# EAGLE board 3DO (EAGLE 9.6.2)
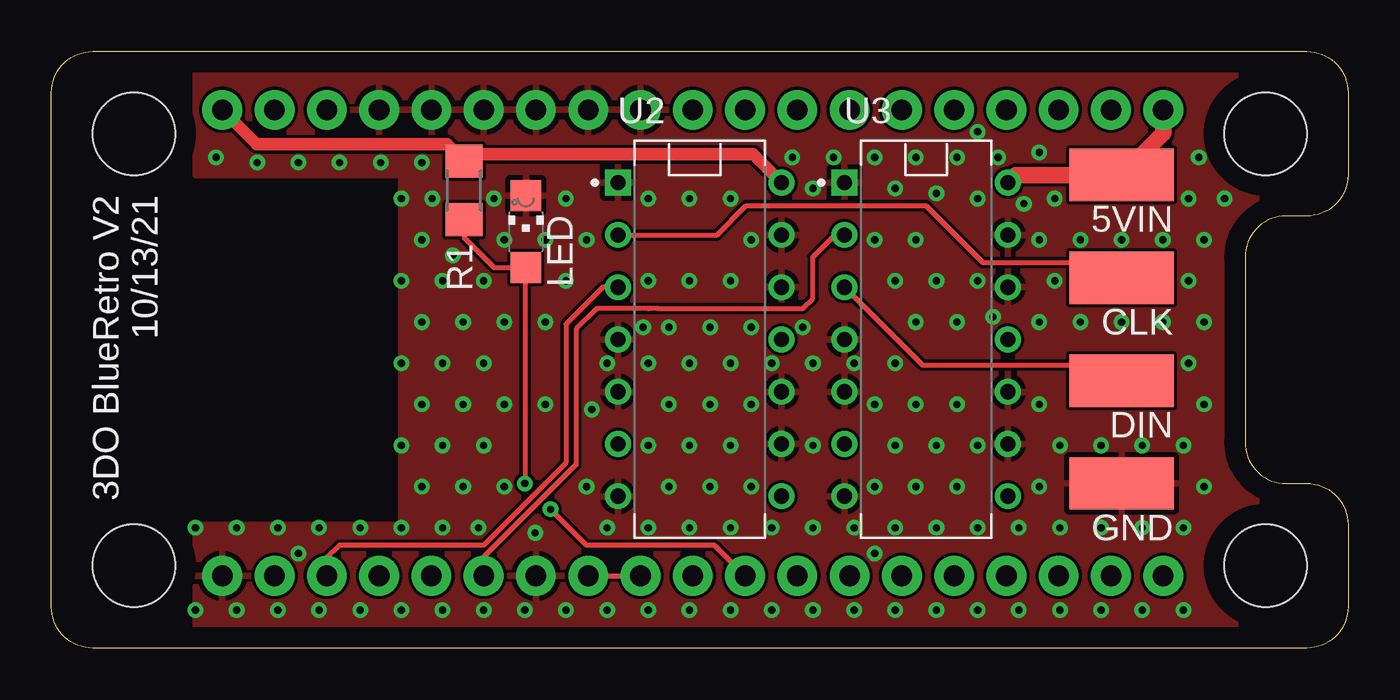
[diagram p0: board, top side]
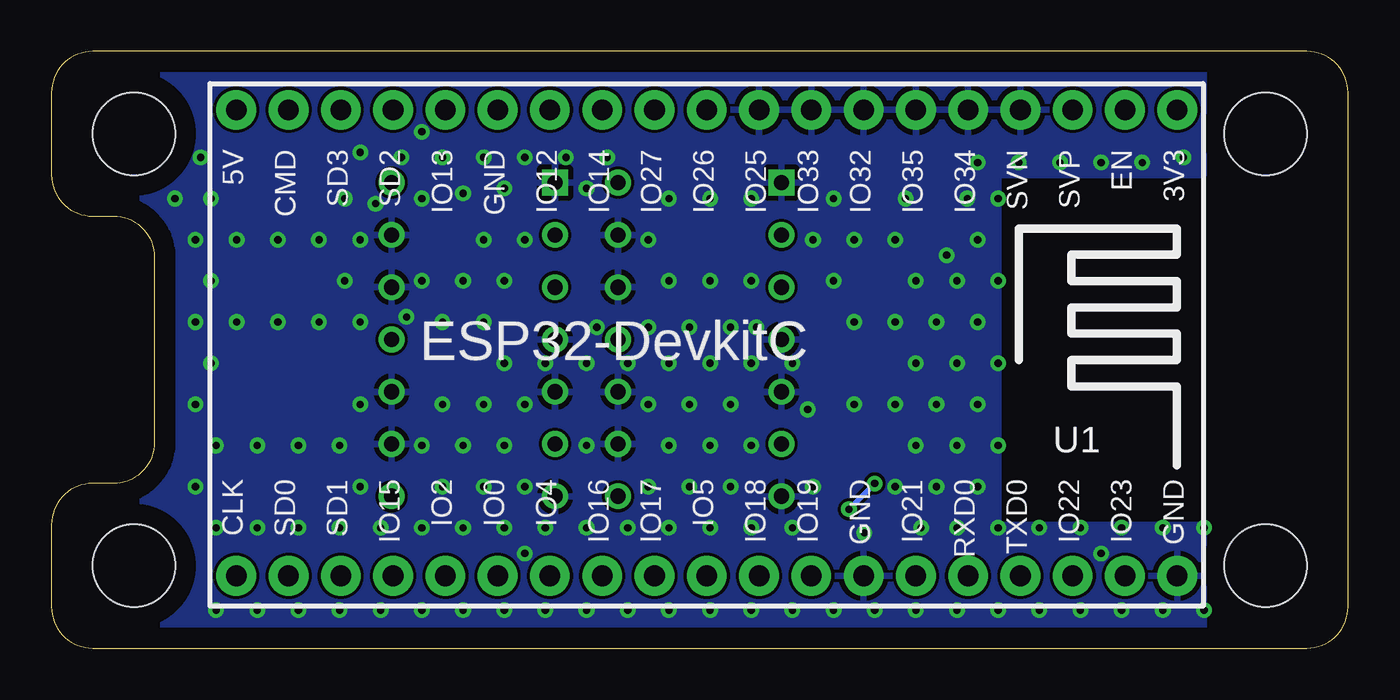
[diagram p1: board, bottom side, seen from below]

Size 63 x 29 mm. Coordinates in mm from the lower left corner, seen from the top.
Outline: 0,2 0,27 arc-90 2,29 61,29 arc-90 63,27 63,23 arc-90 61,21 60,21 arc90 58,19 58,10 arc90 60,8 61,8 arc-90 63,6 63,2 arc-90 61,0 2,0 arc-90 0,2
Copper layers (1*16): Top 0.035mm / dielectric 1.5mm / Bottom 0.035mm
Design rules "default": minimum track width 6mil, minimum drill 0.35mm, track to track 6mil, track to pad 6mil, pad to pad 6mil, via to via 6mil, smd to smd 6mil, copper to edge 40mil, drill to drill 6mil, minimum pad ring 10mil, minimum via ring 8mil, stop-mask expansion 4mil, vias tented up to drill 0.5mm, thermal gap 10mil
Holes 4 mm at 4,4 4,25 59,25 59,4

## Footprints (pad centres in the part's own frame; a part is rotated, then mirrored left to right if it is on the bottom)
SMD2,54-5,08 = smd 2.54 x 5.08: 1 0,0
CHIPLED_1206 = smd 1.5 x 1.5: A 0,-1.75; C 0,1.75
R1206 = smd 1.6 x 1.803: 1 -1.422,0; 2 1.422,0
ESP32-DEVKITC = drill 1 pad 1.93: 1 -22.87,-11.42; 2 -20.33,-11.42; 3 -17.79,-11.42; 4 -15.25,-11.42; 5 -12.71,-11.42; 6 -10.17,-11.42; 7 -7.63,-11.42; 8 -5.09,-11.42; 9 -2.55,-11.42; 10 -0.01,-11.42; 11 2.53,-11.42; 12 5.07,-11.42; 13 7.61,-11.42; 14 10.15,-11.42; 15 12.69,-11.42; 16 15.23,-11.42; 17 17.77,-11.42; 18 20.31,-11.42; 19 22.85,-11.42; 20 22.85,11.23; 21 20.31,11.23; 22 17.77,11.23; 23 15.23,11.23; 24 12.69,11.23; 25 10.15,11.23; 26 7.61,11.23; 27 5.07,11.23; 28 2.53,11.23; 29 -0.01,11.23; 30 -2.55,11.23; 31 -5.09,11.23; 32 -7.63,11.23; 33 -10.17,11.23; 34 -12.71,11.23; 35 -15.25,11.23; 36 -17.79,11.23; 37 -20.33,11.23; 38 -22.87,11.23
DIP794W45P254L1969H508Q14 = drill 0.74 pad 1.14 square: 1 -3.97,7.62 | drill 0.74 pad 1.14: 2 -3.97,5.08; 3 -3.97,2.54; 4 -3.97,0; 5 -3.97,-2.54; 6 -3.97,-5.08; 7 -3.97,-7.62; 8 3.97,-7.62; 9 3.97,-5.08; 10 3.97,-2.54; 11 3.97,0; 12 3.97,2.54; 13 3.97,5.08; 14 3.97,7.62

## Placement (x,y rotation side)
5VIN  [SMD2,54-5,08]  52,23 90 top
CLK  [SMD2,54-5,08]  52,18 90 top
DIN  [SMD2,54-5,08]  52,13 90 top
GND  [SMD2,54-5,08]  52,8 90 top
LED  [CHIPLED_1206]  23.05,20.24 0 top
R1  84  [R1206]  20.05,22.24 270 top
U1  ESP32DEVKITC  [ESP32-DEVKITC]  31.17,14.74 180 bottom
U2  SN74AHCT125N  [DIP794W45P254L1969H508Q14]  31.5,15 0 top
U3  SN74AHCT125N  [DIP794W45P254L1969H508Q14]  42.5,15 0 top

## Library data of the parts
5VIN CLK DIN GND = wirepad
LED R1 = adafruit
U1 = ESP32-DEVKITC
U2 U3 = SN74AHCT125N; AVAILABILITY: In Stock; DESCRIPTION: Quadruple Bus Buffer Gates With 3-State Outputs 14-PDIP -40 to 125; MF: Texas Instruments; MP: SN74AHCT125N; PACKAGE: PDIP-14 Texas Instruments; PRICE: None; PURCHASE-URL: https://pricing.snapeda.com/search/part/SN74AHCT125N/?ref=eda

## Nets
3V3IN: R1.1 U1.1 U2.14
5VIN: 5VIN.1 U1.19 U3.14
CLK: CLK.1 U2.2
CLKGATE: U1.36 U2.3
CSGEN: U1.30 U1.31
DIN: DIN.1 U3.3
DINGATE: U1.33 U3.2
GND: GND.1 LED.C U1.4 U1.5 U1.6 U1.7 U1.8 U1.9 U1.32 U1.38 U2.1 U2.4 U2.5 U2.7 U2.9 U2.10 U2.12 U2.13 U3.1 U3.4 U3.5 U3.7 U3.9 U3.10 U3.12 U3.13
LED: LED.A R1.2 U1.28

## Tracks (layer width: path | path; a pad name or v marks a point on that pad's centre or on a via)
3V3IN
  Top 0.61: U1.1 9.96,24.5 19.21,24.5 R1.1 20.39,24 34.09,24 U2.14
5VIN
  Top 0.813: U1.19 54.02,25.02 5VIN.1 46.85,23 U3.14
CLK
  Top 0.254: U2.2 32.33,20.08 33.75,21.5 42.5,21.5 45.25,18.75 51.25,18.75 CLK.1
CLKGATE
  Top 0.254: U1.36 13.38,4.38 14,5 21,5 25,9 25,15.75 26.79,17.54 U2.3
CSGEN
  Top 0.254: U1.31 U1.30
DIN
  Top 0.254: U3.3 42.32,13.75 51.25,13.75 DIN.1
DINGATE
  Top 0.254: U1.33 21,4.42 25.5,8.93 25.5,15.5 26.5,16.5 29,16.5 29.5,16.5 36.5,16.5 37,17 37,19 38.08,20.08 U3.2
GND  (via drill 0.35)
  other vias: 7,1.85 7,5.85 9,1.85 9,5.85 8,23.85 11,1.85 11,5.85 10,23.6 13,1.85 12,4.6 13,5.85 12,23.6 15,1.85 15,5.85 14,23.6 17,1.85 17,5.85 17,9.85 17,13.85 17,17.85 17,21.85 16,23.6 19,1.85 19,5.85 18,7.85 19,9.85 18,11.85 19,13.85 18,15.85 19,17.85 18,19.85 18.5,21.85 18,23.6 21,1.85 20.75,5.85 20,7.85 21,9.85 20,11.85 21,13.85 20,15.85 21,17.85 19.5,19.1 21.5,21.85 23,1.85 23.5,5.6 22,7.85 22,11.85 22,15.85 22,19.85 25,1.85 24,11.85 24,15.85 25,17.85 24,19.85 25,21.85 27,1.85 27,5.85 26,7.85 26.25,11.6 27,13.85 26,19.85 29,1.85 29,5.85 29,9.85 29,13.85 28.75,15.6 29,17.85 29,21.85 31,1.85 31,5.85 30,7.85 31,9.85 30,11.85 31,13.85 30,15.6 31,17.85 31,21.85 33,1.85 33,5.85 32,7.85 33,9.85 32,11.85 33,13.85 32,15.6 33,17.85 33,21.85 35,1.85 35,5.85 34,7.85 34,11.85 35,13.85 34,15.6 34,19.85 37,1.85 37,5.85 37,9.85 37,13.85 36.5,15.6 37,22.35 36,23.85 39,1.85 39,5.85 39,13.85 38,23.85 41,1.85 40,4.6 41,5.85 40,7.85 41,9.85 40,11.85 41,13.85 41,17.85 40,19.85 41,22.35 40,23.85 43,1.85 43,5.85 42,7.85 43,9.85 42,11.85 42,15.85 43,17.85 42,19.85 43,22.1 42,23.85 45,1.85 45,5.85 44,7.85 45,9.85 44,11.85 44,15.85 45,17.85 45,21.85 44,23.85 45,25.1 47,1.85 47,5.85 45.75,16.1 47.25,21.6 46,23.85 49,1.85 49,5.85 48,7.85 49,9.85 48,11.85 48,15.85 48.75,17.85 48,19.85 48.75,21.85 48,24.1 51,1.85 51,5.85 51,9.85 50,15.85 50,19.85 53,1.85 53,5.85 53,9.85 52,15.85 52,19.85 55,1.85 55,5.85 55,9.85 55.25,13.85 54,15.85 55.25,17.85 54,19.85 55.25,21.85 56,7.85 56,11.85 56,15.85 56,19.85 57,21.85 55.75,23.85
  pour Top: 7,29 7,23 17,23 17,6 7,6 7,0 63,0 63,29
  pour Bottom: 7,0 63,0 63,29 7,29 7,23 17,23 17,6 7,6
LED  (via drill 0.35)
  Top 0.254: U1.28 32.21,5 26,5 v24.25,6.75 | R1.2 20.05,19.95 21.51,18.49 LED.A 23,18.44 v23,8
  Bottom 0.254: v24.25,6.75 v23,8

## Text on the board
tNames: 3DO BlueRetro V2 / 10/13/21